# Altium PCB 树莓派USB扩展板.PcbDoc
Units mm, origin at the board's own origin, x right, y up, seen from the top; angles counter-clockwise.
Board outline 26.36 x 36.07 mm, 2 copper layers (Top Layer, Bottom Layer); 12 components, 14 nets, 68 pads, 8 vias.
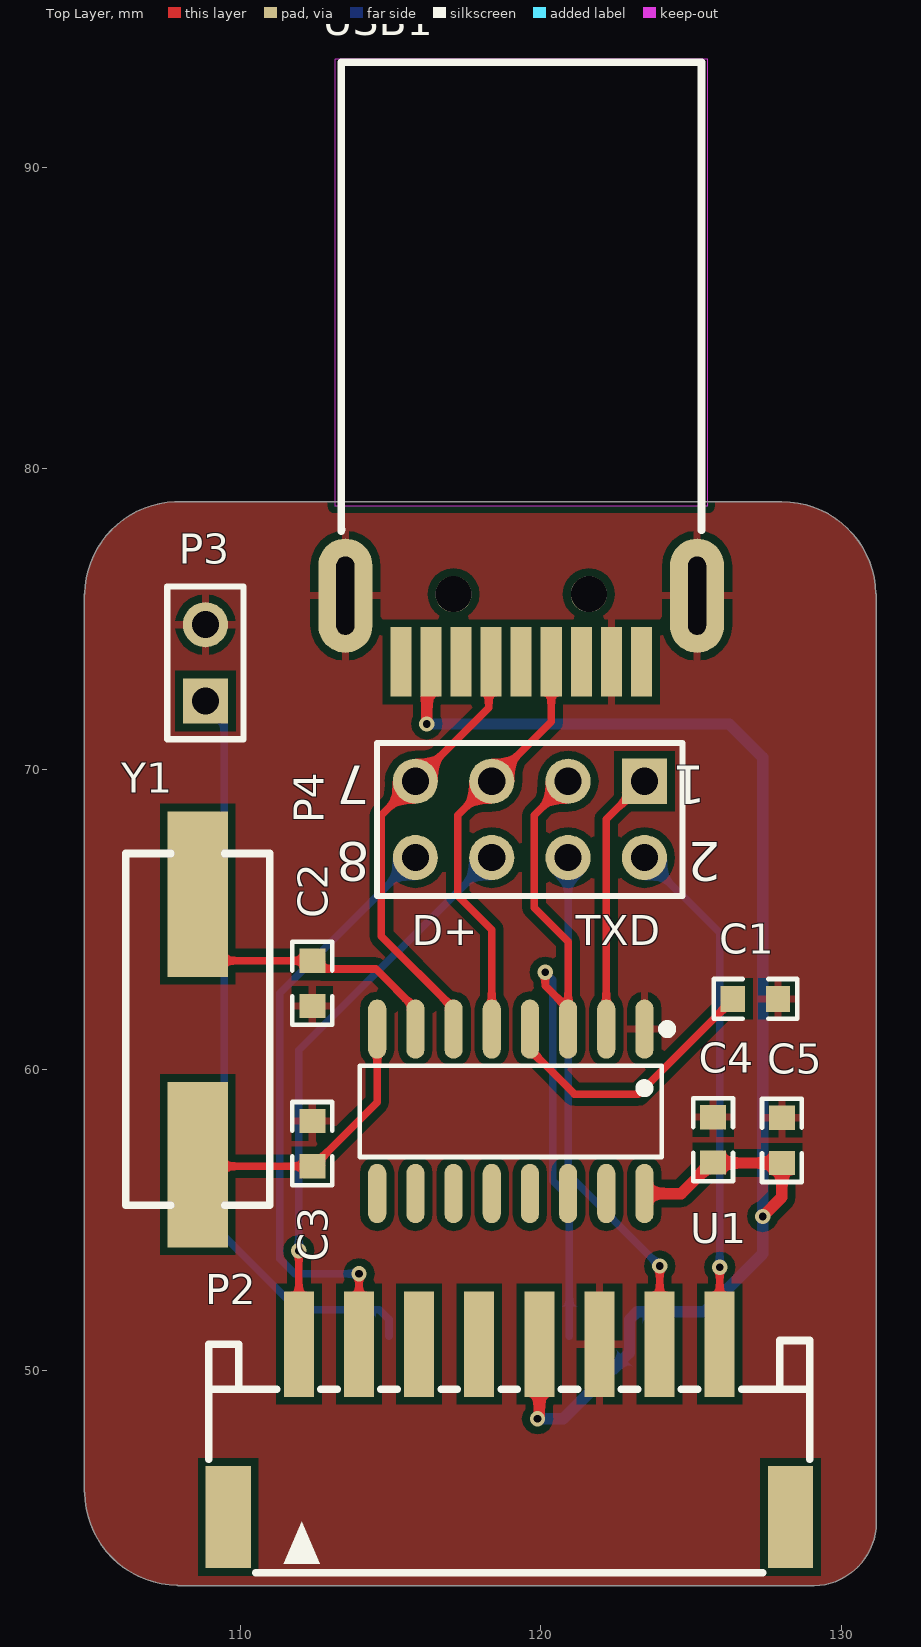
[diagram p0: Top Layer view]
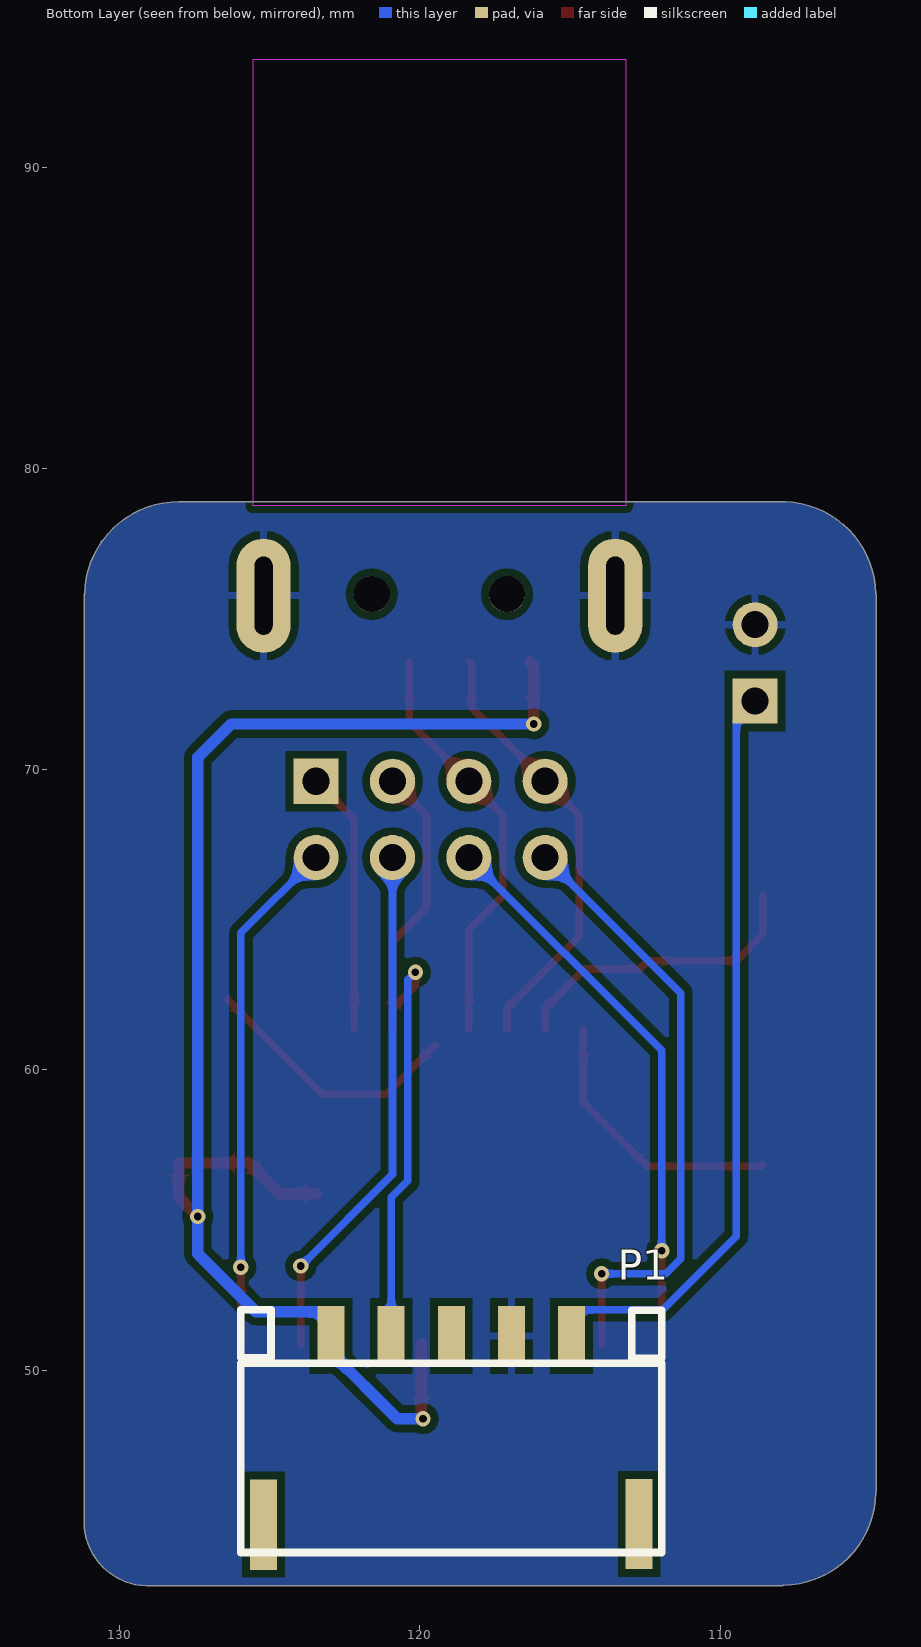
[diagram p1: Bottom Layer view, seen from below]

## Layer stack, top to bottom
Top Solder: solder mask 0.0102, Solder Resist, Dk 3.5
Top Layer: signal copper 0.0356
Dielectric 1: dielectric 0.32, FR-4, Dk 4.8
Bottom Layer: signal copper 0.0356
Bottom Solder: solder mask 0.0102, Solder Resist, Dk 3.5

## Board outline
104.823,45.926 cw(c104.931,45.993) 104.804,45.993 104.804,75.769 cw(c104.931,75.769) 104.823,75.837 cw(c107.95,75.769) 107.828,78.894 cw(c107.852,78.769) 107.852,78.897 128.016,78.897 cw(c128.016,75.769) 131.143,75.837 cw(c131.035,75.769) 131.162,75.769 131.162,44.929 cw(c131.035,44.929) 131.162,44.92 cw(c129.035,44.958) 129.091,42.831 cw(c129.061,42.955) 129.061,42.828 107.969,42.828 cw(c107.969,42.955) 107.902,42.847 cw(c107.95,45.974)

## Design rules (kind name [scope] priority, off if disabled: settings)
Clearance [All] p1: gap=0.254 ignorepadtopadclearanceinfootprint=FALSE except(0: Arc-Hole Track-Hole SMDPad-Hole THPad-Hole Via-Hole Fill-Hole Poly-Hole Region-Hole Text-Hole)
PolygonConnect [All] p1: connectstyle=Relief reliefconductorwidth=0.254 reliefentries=4 polygonreliefangle="90 Angle" airgapwidth=0.254
RoutingVias [All] p1: holewidth=0.254 width=0.508 viastyle="Through Hole" minholewidth=0.254 minwidth=0.508 maxholewidth=0.711 maxwidth=1.27
SolderMaskExpansion [All] p1: expansion=0.102
Width [All] p1: maxlimit=1.27 minlimit=0.254 preferedwidth=0.254
30 further rules are at their usual default settings.

## Components (designator, comment, footprint, x,y, rotation, side; value= is the part's Value field where it differs from the comment)
C1 "104" R0603 128.051,62.208 r180 top
C2 "22P" R0603 112.246,61.959 r90 top
C3 "22P" R0603 112.544,58.455 r270 top
C4 "104" R0603 125.879,58.582 r270 top
C5 "10UF" R0603 127.867,56.734 r90 top
P1 "Header 5" PH2.0-5PWB 118.947,47.752 r270 bottom
P2 "Header 8" CONN-SMD_X2016WRS-08-9TSW 118.947,47.879 r0 top
P3 "Header 2" HDR1X2 108.839,72.263 r90 top
P4 "Header 4X2" HDR2X4 123.444,69.596 r180 top
U1 "CH340G" SOIC-16_L9.9-W3.9-P1.27-LS6.0-BL 559.041,-371.936 r180 top
USB1 "USB3.0-AM-SMD-9P" USB3.0-AM-SMD-9P 119.344,83.033 r180 top
Y1 "12MHz" OSC-SMD_L11.4-W4.5-LS12.5 108.585,61.341 r270 top

## Footprints (in the part's own frame and the unit in brackets; to place one, negate y for a bottom-side part, rotate by r counter-clockwise, add the part's x,y. Pads: shape width x height; smd on the part's side, far side on the other; paste and mask are expansions set on the pad)
CONN-SMD_X2016WRS-08-9TSW [mm]
  rect 1x3.5 smd: 1(-7,2.988) 2(-5,2.988) 3(-3,2.988) 4(-1,2.988) 5(1,2.988) 6(3,2.988) 7(5,2.988) 8(7,2.988)
  rect 1.5x3.4 smd: 9(9.35,-2.761) 10(-9.35,-2.761)
  silkscreen extent -10,-4.61 10,3.11
HDR1X2 [mm] "Connector; Header; 2 Position"
  rect 1.5x1.5 hole 0.9: 1(0,0)
  round 1.5 hole 0.9: 2(2.54,0)
  silkscreen extent -1.27,-1.27 3.81,1.27
HDR2X4 [mm] "Connector; Header; 4x2 Position"
  rect 1.5x1.5 hole 0.9: 1(0,0)
  round 1.5 hole 0.9: 2(0,2.54) 3(2.54,0) 4(2.54,2.54) 5(5.08,0) 6(5.08,2.54) 7(7.62,0) 8(7.62,2.54)
  silkscreen extent -1.27,-1.27 8.89,3.81
OSC-SMD_L11.4-W4.5-LS12.5 [mm]
  rect 5.5x2 smd: 1(-4.5,0) 2(4.5,0)
  silkscreen extent -5.85,-2.4 5.85,2.4
PH2.0-5PWB [mm]
  rect 3x0.9 smd: 0(2.864,6.25) 0(2.889,-6.25)
  rect 2x0.9 smd: 1(-3.386,4) 2(-3.386,2) 3(-3.386,0) 4(-3.386,-2) 5(-3.386,-4)
  silkscreen extent -4.26,-7 3.81,7
R0603 [mm]
  rect 0.806x0.864 smd: 1(0.162,-0.149) 2(1.668,-0.149)
  silkscreen extent -0.47,-0.81 2.3,0.51
SOIC-16_L9.9-W3.9-P1.27-LS6.0-BL [mil]
  oval 23.7x77.6 smd: 1(17149.5,-17058.56) 2(17199.5,-17058.56) 3(17249.5,-17058.56) 4(17299.5,-17058.56) 5(17349.5,-17058.56) 6(17399.5,-17058.56) 7(17449.5,-17058.56) 8(17499.5,-17058.56) 9(17499.5,-16843.17) 10(17449.5,-16843.17) 11(17399.5,-16843.17) 12(17349.5,-16843.17) 13(17299.5,-16843.17) 14(17249.5,-16843.17) 15(17199.5,-16843.17) 16(17149.5,-16843.17)
  silkscreen extent 17114,-17064 17522,-16891
USB3.0-AM-SMD-9P [mm]
  rect 0.7x2.3 smd: 1(3,9.463) 2(1,9.463) 3(-1,9.463) 4(-3,9.463) 5(-4,9.463) 6(-2,9.463) 7(0,9.463) 8(2,9.463) 9(4,9.463)
  oval 1.8x3.8 hole 0.6 slot 2.6 at 90 deg: 10(-5.85,7.263) 10(5.85,7.263)
  round 1.2 hole 1.2 unplated: ""(-2.25,7.213) ""(2.25,7.214)
  Keep-Out Layer board cut-out: -6.2,4.264 -6.2,-10.586 6.2,-10.586 6.2,4.264
  silkscreen extent -6,-10.49 5.98,5.11

## Part data
C1 C2 C3 C4 C5: library part C
P1: "Header, 5-Pin", LatestRevisionDate=17-Jul-2002, LatestRevisionNote="Re-released for DXP Platform.", Publisher="Altium Limited"
P2: "Header, 8-Pin", LatestRevisionDate=17-Jul-2002, LatestRevisionNote="Re-released for DXP Platform.", Publisher="Altium Limited"
P3: "Header, 2-Pin", LatestRevisionDate=17-Jul-2002, LatestRevisionNote="Re-released for DXP Platform.", Publisher="Altium Limited"
P4: "Header, 4-Pin, Dual row", LatestRevisionDate=17-Jul-2002, LatestRevisionNote="Re-released for DXP Platform.", Publisher="Altium Limited"
U1: "USB2UART"
Y1: library part XTAL, "Crystal Oscillator", LatestRevisionDate=17-Jul-2002, LatestRevisionNote="Re-released for DXP Platform.", Published=8-Jun-2000, Publisher="Altium Limited"

## Via types
v1: diameter 0.508, hole 0.254, Top Layer to Bottom Layer, 8 vias

## Nets (pads, with @x,y where several pads share a name; then routed paths per layer and width w, separated by ;. In a path a pad name is that pad's centre, name@x,y a point inside that pad or via, vN(x,y) a via of type N, cw(c..) or ccw(c..) an arc to the next point about the centre after c; other vN are vias at no path point)
5V: C4.2 C5.1 P1.5 P2.5 U1.16 USB1.1 | length 50.2
  Top Layer w0.381: v1(116.205,71.501) 116.205,73.43 USB1.1 ; v1(119.888,48.387) 119.947,48.446 P2.5 ; U1.16 124.668,55.88 125.701,56.914 C4.2 125.748,56.896 C5.1 128.016,55.753 v1(127.381,55.118)
  Bottom Layer w0.381: v1(116.205,71.501) 126.269,71.501 127.381,70.389 v1(127.381,55.118) 127.381,53.876 125.453,51.948 123.207,51.948 122.947,51.688 P1.5 122.947,50.588 120.746,48.387 v1(119.888,48.387)
D+: P4.5 U1.5 USB1.3 | length 14
  Top Layer w0.254: U1.5 118.364,64.656 117.233,65.787 117.233,68.465 120.344,71.576 USB1.3
D-: P4.7 U1.6 USB1.2 | length 14.7
  Top Layer w0.254: U1.6 117.094,62.035 114.693,64.437 114.693,68.465 118.266,72.038 118.266,73.491 USB1.2
GND: C1.1 C2.1 C3.1 C4.1 C5.2 P1.2 P2.6 P3.2 U1.1 USB1.4 USB1.10
M_SCTR: P1.1 P3.1 | length 25.2
  Bottom Layer w0.254: P3.1 109.462,71.64 109.462,54.463 111.913,52.011 114.624,52.011 114.947,51.688 P1.1
NetC1_2: C1.2 U1.4 | length 8.9
  Top Layer w0.254: U1.4@119.507,60.794 121.119,59.182 123.236,59.182 126.383,62.328 C1.2
NetC2_2: C2.2 U1.7 Y1.1 | length 10.3
  Top Layer w0.254: Y1.1 108.585,64.5 109.458,63.627 C2.2 112.671,63.351 114.509,63.351 115.824,62.035 U1.7
NetC3_2: C3.2 U1.8 Y1.2 | length 9.3
  Top Layer w0.254: Y1.2 108.64,56.787 112.424,56.787 114.554,58.917 U1.8
QX_D+: P2.1 P4.6 | length 18.8
  Top Layer w0.254: P2.1 v1(111.947,53.975)
  Bottom Layer w0.254: v1(111.947,53.975) 111.947,60.639 P4.6
QX_D-: P2.2 P4.8 | length 20.4
  Top Layer w0.254: P2.2 v1(113.947,53.213)
  Bottom Layer w0.254: v1(113.947,53.213) 111.811,53.213 111.312,53.712 111.312,62.544 P4.8
QX_RXD: P2.7 P4.4 | length 17.5
  Top Layer w0.254: P2.7 123.952,50.872 v1(123.952,53.467)
  Bottom Layer w0.254: P4.4 120.904,56.515 v1(123.952,53.467)
QX_TXD: P2.8 P4.2 | length 17.3
  Top Layer w0.254: P2.8 v1(125.947,53.43) v1@125.984,53.467
  Bottom Layer w0.254: P4.2 125.947,64.553 v1(125.947,53.43)
RXD: P1.4 P4.3 U1.3 | length 23.1
  Top Layer w0.254: v1(120.142,63.246) 120.142,62.797 U1.3@120.904,62.035 ; U1.3 U1.3@120.904,62.035 ; P4.3 119.773,68.465 119.773,65.393 120.904,64.262 U1.3@120.904,62.035
  Bottom Layer w0.254: v1(120.142,63.246) 120.396,62.992 120.396,56.305 120.947,55.753 P1.4
TXD: P4.1 U1.2 | length 8.8
  Top Layer w0.254: U1.2 122.174,68.326 P4.1
pads on no net: P1.0 P1.3 P2.3 P2.4 P2.9 P2.10 U1.9 U1.10 U1.11 U1.12 U1.13 U1.14 U1.15 USB1. USB1.5 USB1.6 USB1.7 USB1.8 USB1.9

## Polygon pours and split planes (outlines as drawn)
GND on Top Layer "GND_L01_P000" (solid, remove dead copper, pour order 0): 104.823,45.926 cw(c104.931,45.993) 104.804,45.993 104.804,75.769 cw(c104.931,75.769) 104.823,75.837 cw(c107.95,75.769) 107.828,78.894 cw(c107.852,78.769) 107.852,78.897 128.016,78.897 cw(c128.016,75.769) 131.143,75.837 cw(c131.035,75.769) 131.162,75.769 131.162,44.929 cw(c131.035,44.929) 131.162,44.92 cw(c129.035,44.958) 129.091,42.831 cw(c129.061,42.955) 129.061,42.828 107.969,42.828 cw(c107.969,42.955) 107.902,42.847 cw(c107.95,45.974)
GND on Bottom Layer "GND_L02_P001" (solid, remove dead copper, pour order 1): 104.823,45.926 cw(c104.931,45.993) 104.804,45.993 104.804,75.769 cw(c104.931,75.769) 104.823,75.837 cw(c107.95,75.769) 107.828,78.894 cw(c107.852,78.769) 107.852,78.897 128.016,78.897 cw(c128.016,75.769) 131.143,75.837 cw(c131.035,75.769) 131.162,75.769 131.162,44.929 cw(c131.035,44.929) 131.162,44.92 cw(c129.035,44.958) 129.091,42.831 cw(c129.061,42.955) 129.061,42.828 107.969,42.828 cw(c107.969,42.955) 107.902,42.847 cw(c107.95,45.974)

## Other copper
Top Layer:
  region net RXD: 119.888,63.246
  region net RXD: 119.888,63.246
  region net RXD: 119.888,63.246
  region: 111.887,52.197
Bottom Layer:
  region net NetC1_2: 125.141,62.386
  region: 108.712,71.882
  region: 108.839,72.263

## Silkscreen, mask and mechanical layers (free items; w line width, h text height)
Top Overlay:
  text "D+" at 115.697,64.135 h1
  text "TXD" at 121.158,64.135 h1
Mechanical 1:
  lines w0.254: 104.804,45.993 104.804,75.778 104.806,75.796 104.811,75.813 104.823,75.837 104.828,76.034 104.886,76.424 104.992,76.803 105.145,77.166 105.343,77.507 105.581,77.821 105.857,78.102 106.167,78.346 106.504,78.549 106.865,78.709 107.242,78.822 107.631,78.886 107.837,78.896 107.852,78.897 113.144,78.897 113.144,78.769 125.544,78.769 125.544,78.897 128.218,78.897 128.619,78.844 129.01,78.741 129.384,78.589 129.736,78.389 130.059,78.146 130.348,77.863 130.598,77.545 130.805,77.198 130.966,76.827 131.078,76.439 131.138,76.039 131.147,75.829 131.155,75.813 131.16,75.796 131.162,75.769 131.162,44.92 131.158,44.716 131.074,44.318 130.915,43.943 130.689,43.605 130.402,43.316 130.066,43.086 129.692,42.925 129.295,42.837 129.08,42.829 129.061,42.828 107.96,42.828 107.942,42.83 107.925,42.835 107.902,42.847 107.701,42.85 107.303,42.908 106.916,43.016 106.546,43.172 106.199,43.375 105.881,43.621 105.597,43.905 105.351,44.223 105.148,44.57 104.992,44.94 104.884,45.327 104.826,45.725 104.818,45.933 104.811,45.949 104.806,45.966 104.804,45.993

## Text inside footprints (layer, text, board x,y; h text height)
P4: Top Overlay "2" at 125.984,67.564 h1.27 r180; Top Overlay "1" at 125.476,70.104 h1.27 r180; Top Overlay "7" at 114.3,70.104 h1.27 r180; Top Overlay "8" at 114.3,67.564 h1.27 r180